# Altium PCB PenguinPi.PcbDoc
Units mm, origin at the board's own origin, x right, y up, seen from the top; angles counter-clockwise.
Board outline 65 x 78.84 mm, 2 copper layers (Top Layer, Bottom Layer); 57 components, 63 nets, 263 pads, 88 vias.
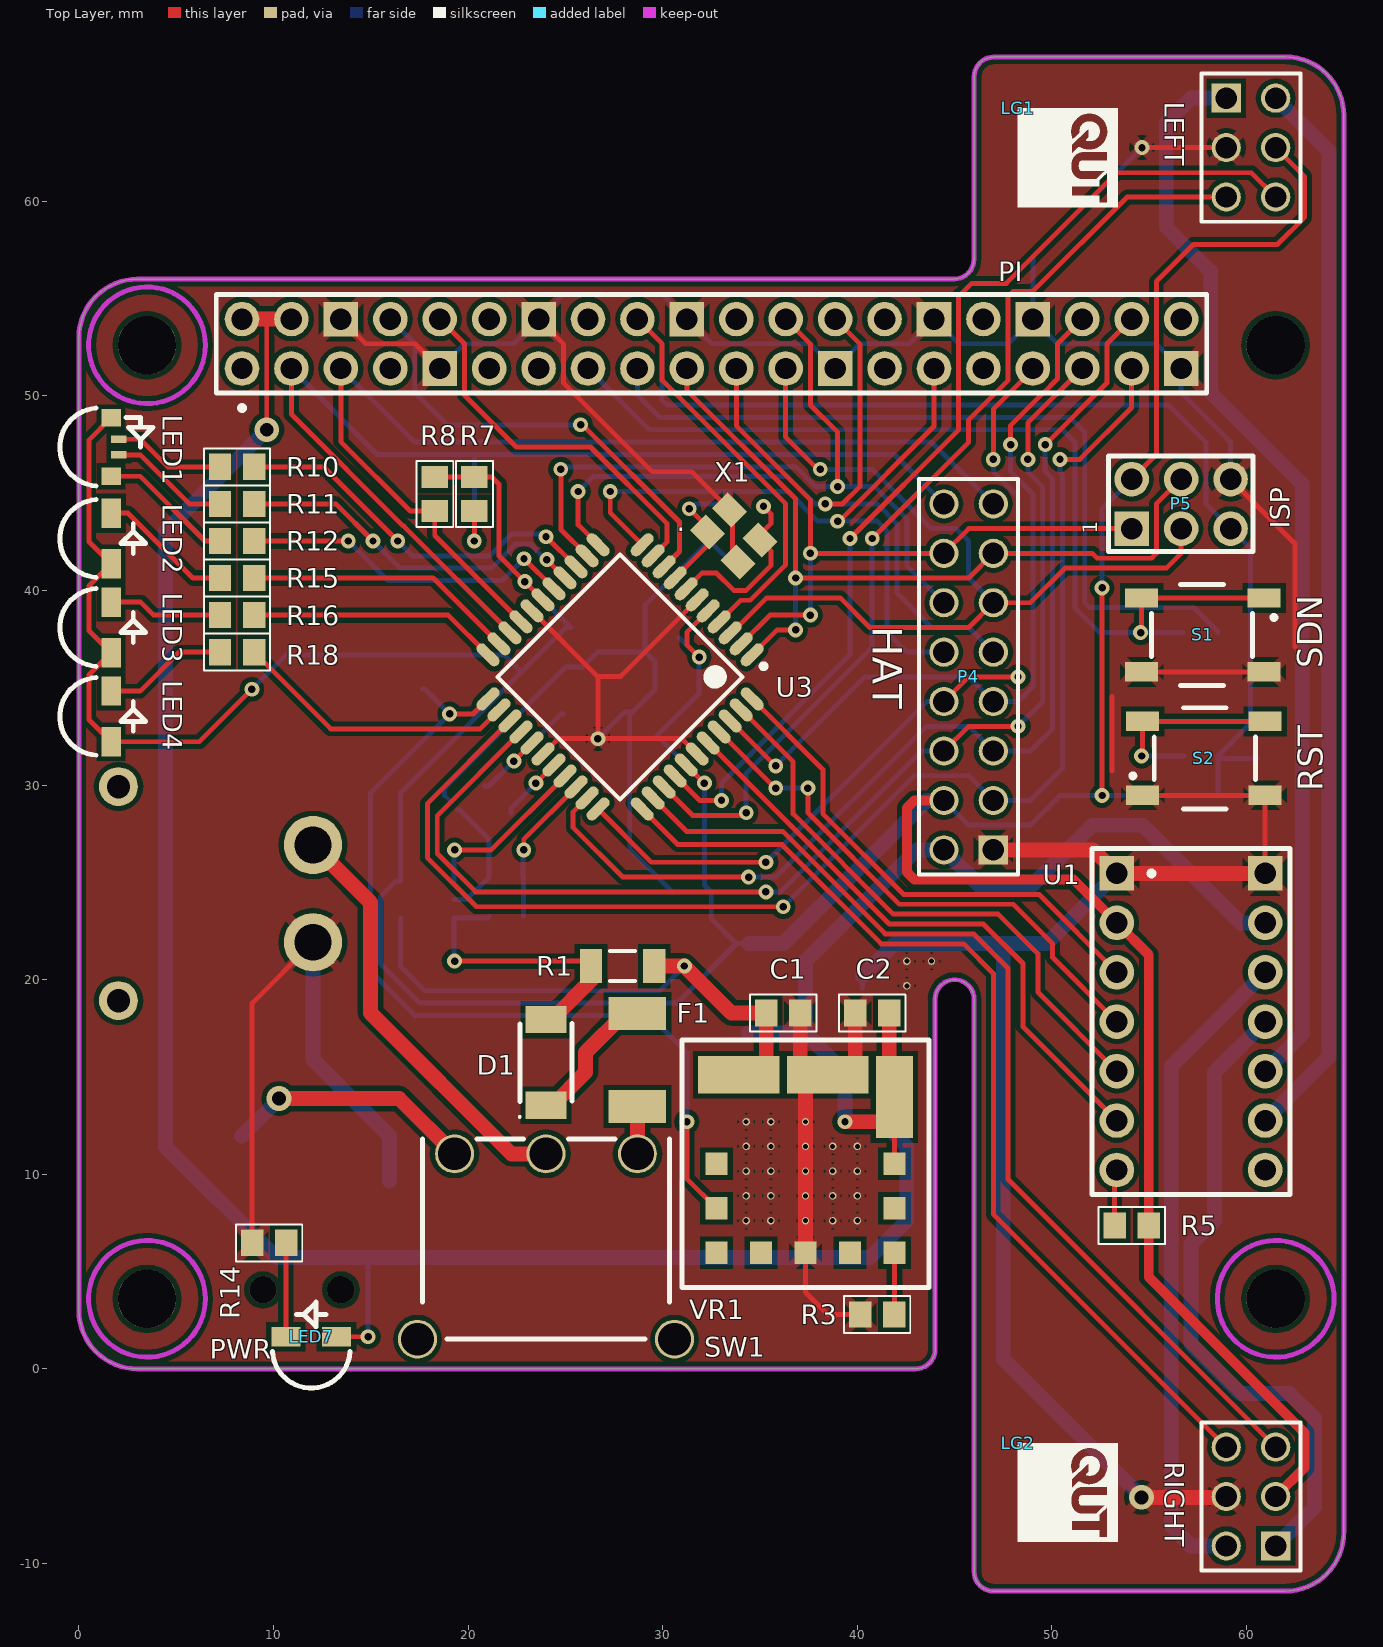
[diagram p0: Top Layer view]
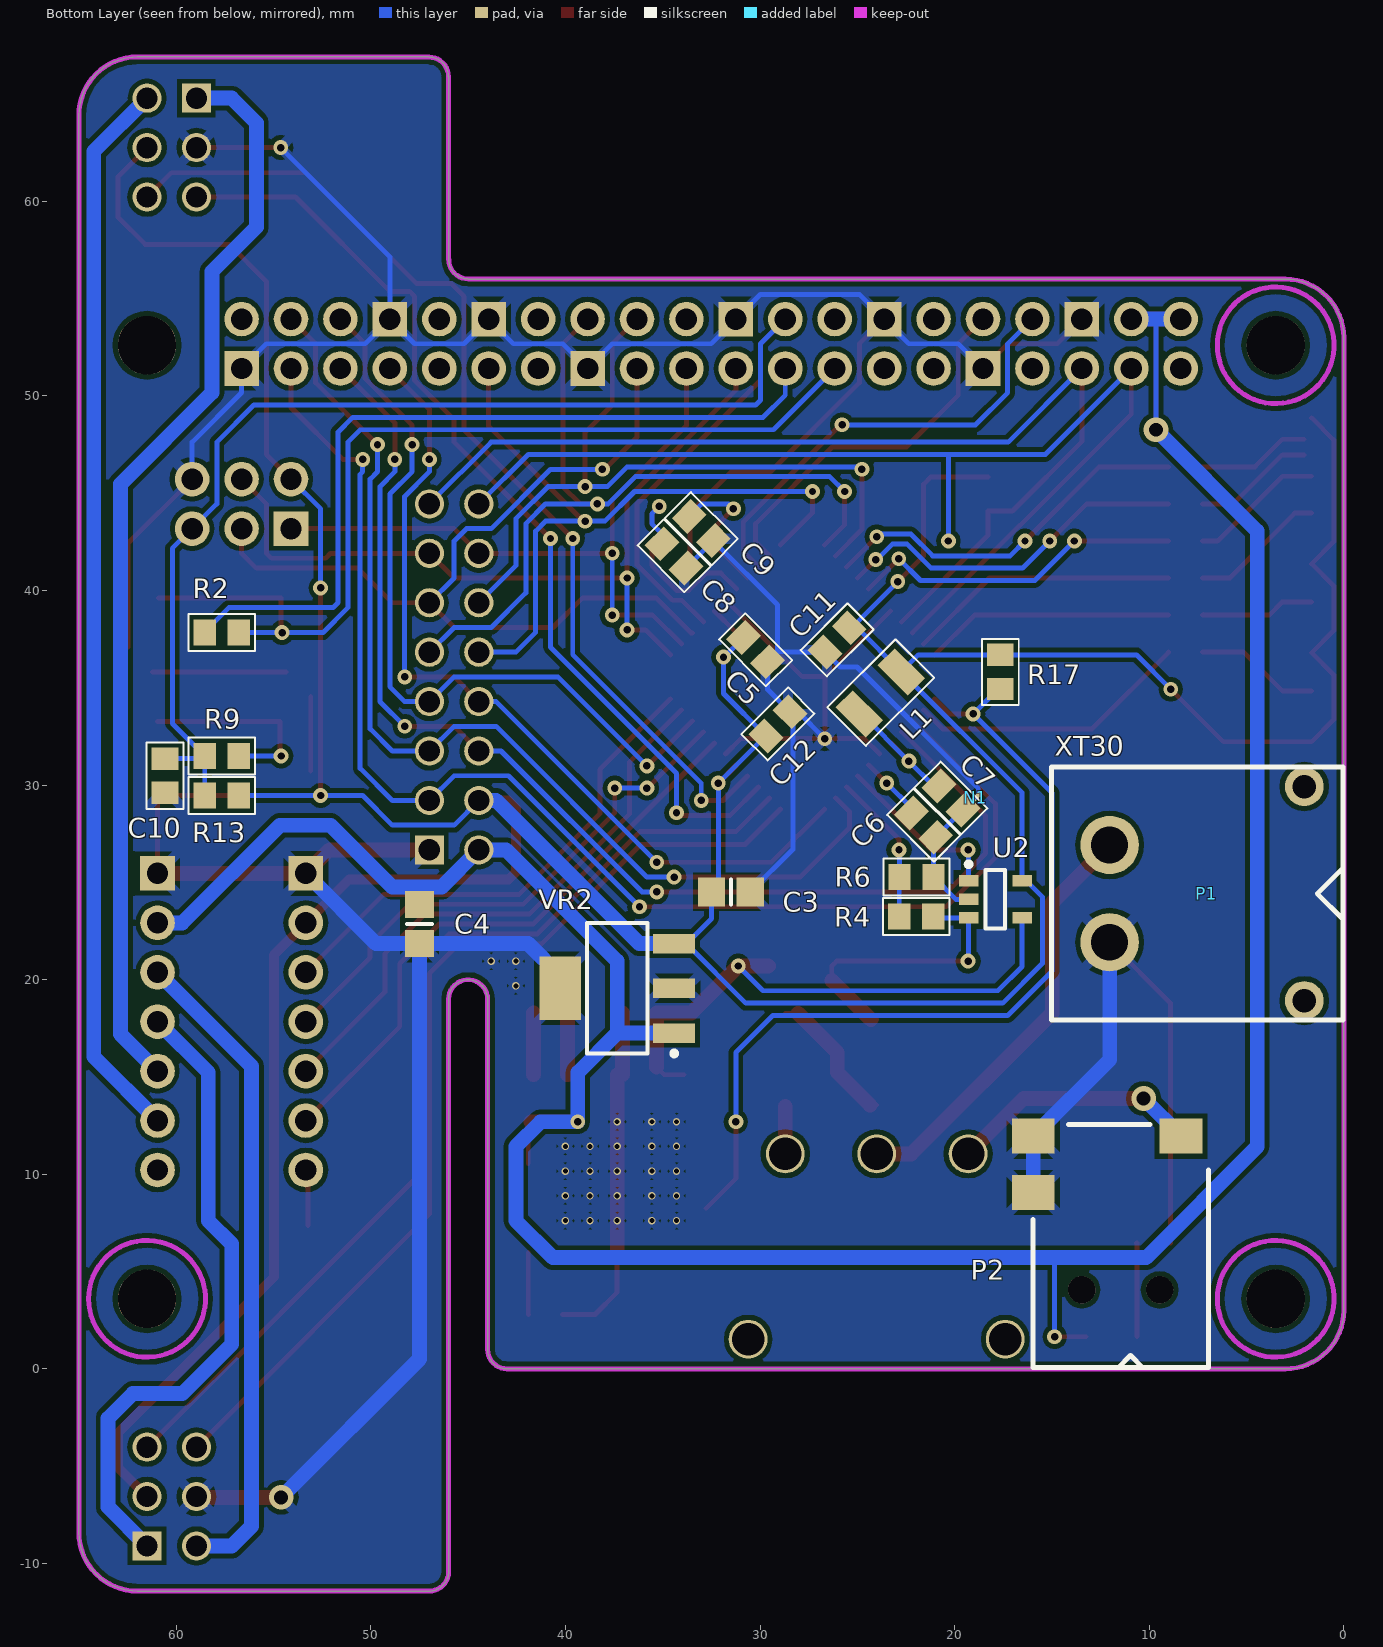
[diagram p1: Bottom Layer view, seen from below]
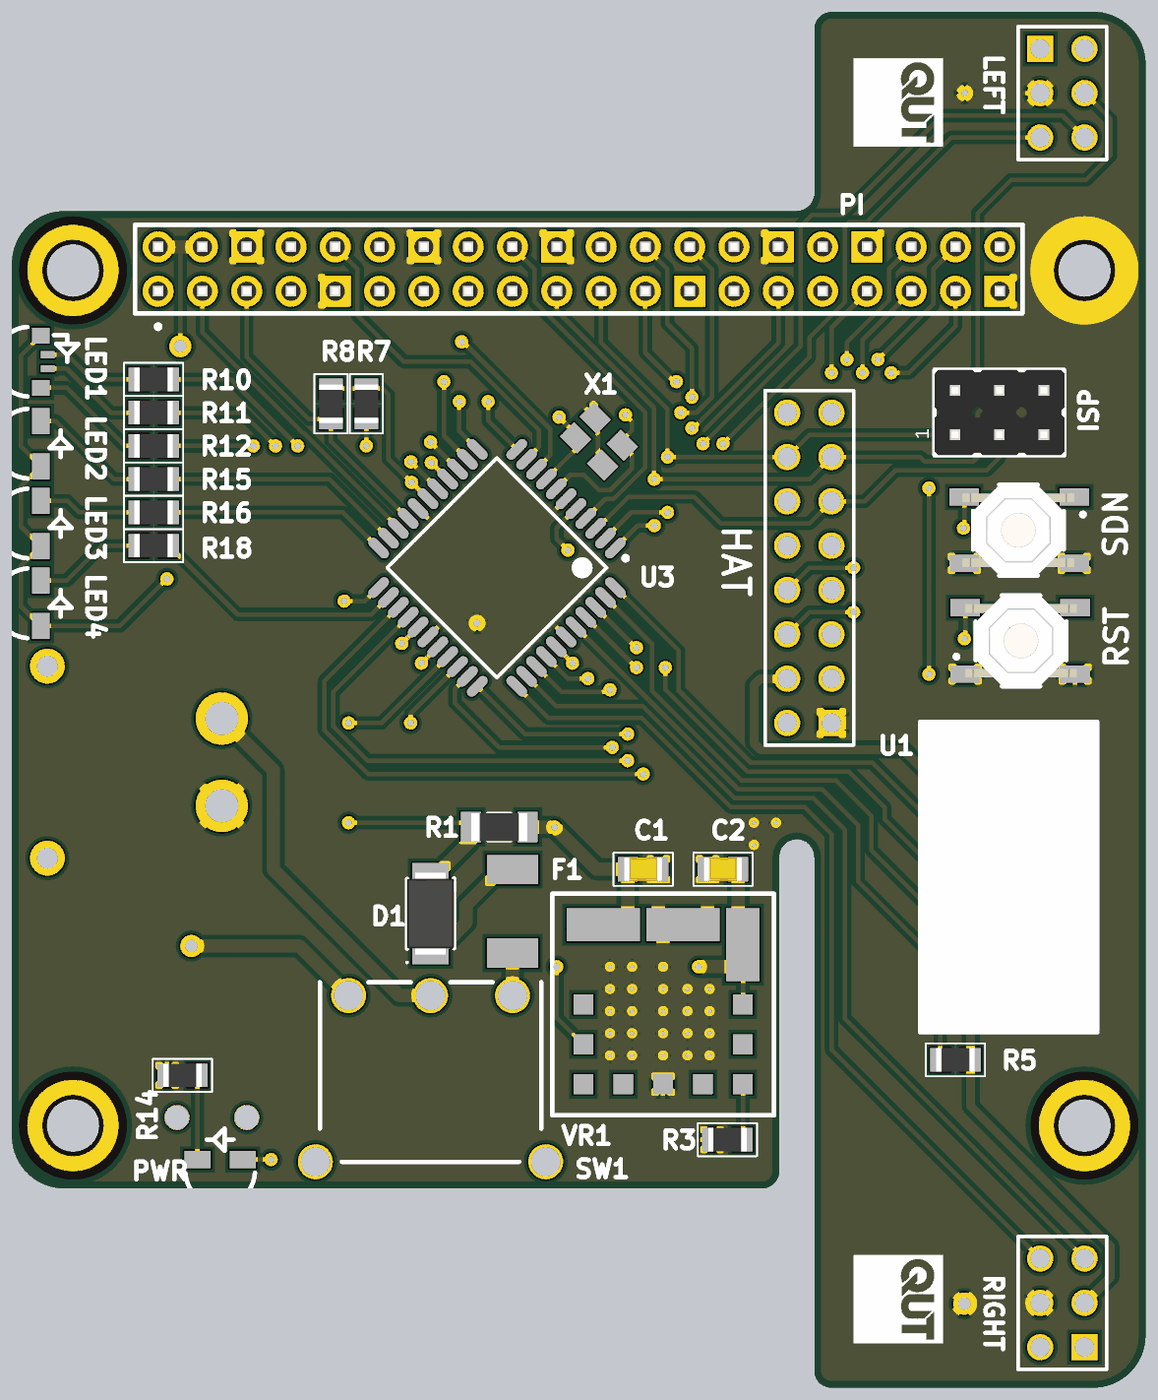
[diagram p2: 3D render of the assembled board from above, using the file's embedded part models]
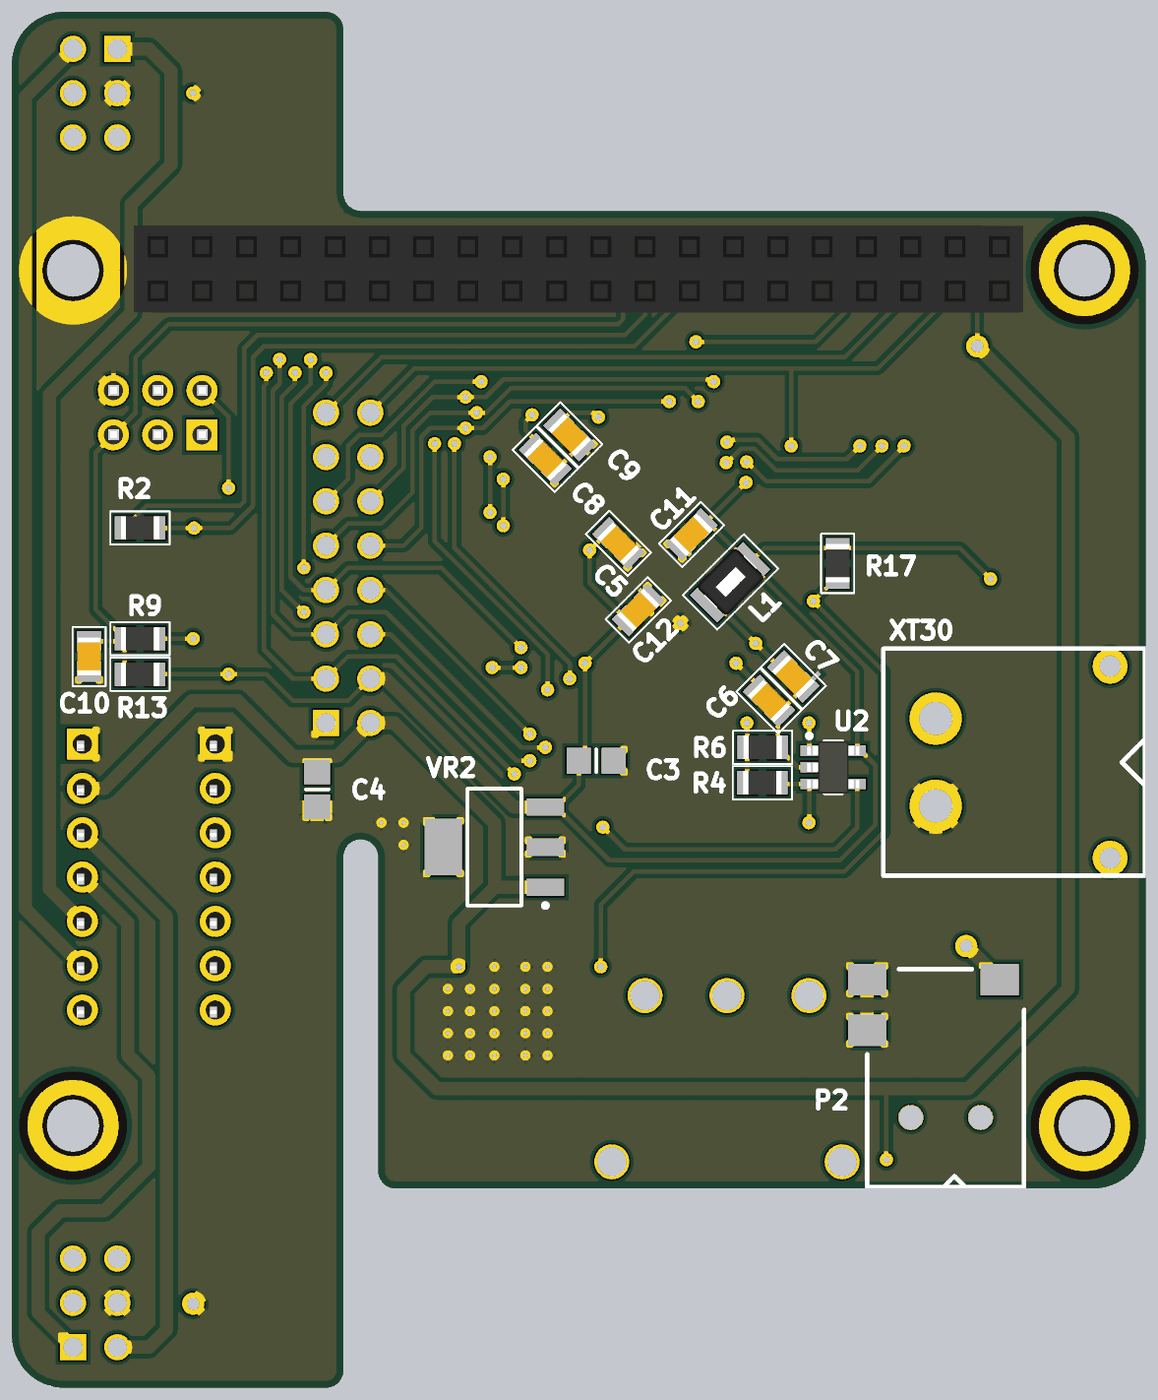
[diagram p3: 3D render of the assembled board from below, using the file's embedded part models]

## Layer stack, top to bottom
Top Solder: solder mask 0.0102, Solder Resist, Dk 3.5
Top Layer: signal copper 0.0356
Dielectric 1: dielectric 0.32, FR-4, Dk 4.8
Bottom Layer: signal copper 0.0356
Bottom Solder: solder mask 0.0102, Solder Resist, Dk 3.5

## Board outline
3,0 43,0 ccw(c43,1) 44,1 44,19 cw(c45,19) 46,19 46,-10.42 ccw(c47,-10.42) 47,-11.42 62,-11.42 ccw(c62,-8.42) 65,-8.42 65,64.42 65.001,64.42 ccw(c62.001,64.42) 62.001,67.42 47.008,67.42 47.008,67.412 ccw(c47.008,66.412) 46.008,66.412 46,66.412 46,57.008 45.992,57.008 cw(c44.992,57.008) 44.992,56.008 44.992,56 3,56 ccw(c3,53) 0,53 0,3 ccw(c3,3)

## Design rules (kind name [scope] priority, off if disabled: settings)
Clearance [All] p1: gap=0.254
PolygonConnect [All] p1: connectstyle=Relief reliefconductorwidth=0.508 reliefentries=4 polygonreliefangle="45 Angle" airgapwidth=0.254
RoutingVias [All] p1: holewidth=0.711 width=1.27 viastyle="Through Hole" minholewidth=0.711 minwidth=1.27 maxholewidth=0.711 maxwidth=1.27
SolderMaskExpansion [All] p1: expansion=0.102
Width [All] p1: maxlimit=0.762 minlimit=0.254 preferedwidth=0.254
30 further rules are at their usual default settings.

## Classes and differential pairs
net class Power: MA1 MA2 MB1 MB2 NetC1_2 NetD1_1 NetD1_2 NetF1_1

## Components (designator, comment, footprint, x,y, rotation, side; value= is the part's Value field where it differs from the comment)
C1 "CAP SMD" CAPC2012X07N 36.195,18.288 r180 top
C2 "CAP SMD" CAPC2012X07N 40.767,18.288 r0 top
C3 "Cap" 6-0805_M 31.496,24.511 r0 bottom
C4 "Cap Pol1" 6-0805_M 47.498,22.86 r270 bottom
C5 "CAP SMD" CAPC2012X07N 30.226,36.957 r45 bottom
C6 "CAP SMD" CAPC2012X07N 21.59,27.94 r45 bottom
C7 "CAP SMD" CAPC2012X07N 20.193,29.337 r45 bottom
C8 "CAP SMD" CAPC2012X07N 34.417,41.783 r45 bottom
C9 "CAP SMD" CAPC2012X07N 33.02,43.18 r45 bottom
C10 "CAP SMD" CAPC2012X07N 60.579,30.48 r90 bottom
C11 "CAP SMD" CAPC2012X07N 26.035,37.465 r135 bottom
C12 "CAP SMD" CAPC2012X07N 29.083,33.147 r315 bottom
D1 "SMD DIODE" SODFL470X110-2N 24.003,15.748 r90 top
F1 "RGEF250" MF-MSMF250/16X-2 28.702,15.875 r90 top
L1 "INDUCTOR SMD" CM322522 22.738,35.814 r315 bottom
LED1 "LED RGB RightAngle" "LED RGB RightAngle" 1.651,47.371 r270 top
LED2 "" "LED YELLOW RightAngle" 1.651,42.672 r270 top
LED3 "" "LED YELLOW RightAngle" 1.651,38.1 r270 top
LED4 "" "LED YELLOW RightAngle" 1.651,33.528 r270 top locked
LED7 "PWR" "LED YELLOW RightAngle" 11.938,1.651 r0 top
LEFT "Header 3X2" HDR2X3 58.96,65.3 r270 top locked
LG1 "QUT_Logo" QUT_Logo 48.26,64.77 r270 top
LG2 "QUT_Logo" QUT_Logo 48.26,-3.81 r270 top
N1 "NETTIE" NETTIE-SMD-5mil 18.785,29.475 r315 bottom net-tie
P1 "XT30" "XT30 - PCB mount" 12.032,24.423 r270 bottom locked
P2 "DC Jack SMD" "DC Jack SMD" 10.962,0.064 r90 bottom locked
P4 "HAT" HDR2X8 46.99,26.67 r90 top locked
P5 "ISP" "Header 3x2 nonstandard" 54.102,43.18 r90 top locked
PI "RPi Header" "RPI 2 Header" 8.382,51.408 r90 top locked
R1 "RES SMD" RESC3216X06M 27.94,20.701 r0 top
R2 "RES SMD" RESC2012X07N 57.658,37.846 r0 bottom
R3 "RES SMD" RESC2012X07N 41.021,2.794 r0 top
R4 "RES SMD" RESC2012X07N 21.971,23.241 r180 bottom
R5 "RES SMD" RESC2012X07N 54.102,7.366 r180 top
R6 "RES SMD" RESC2012X07N 21.957,25.273 r0 bottom
R7 "RES SMD" RESC2012X07N 20.32,44.958 r90 top
R8 "RES SMD" RESC2012X07N 18.288,44.958 r90 top
R9 "RES SMD" RESC2012X07N 57.658,31.496 r0 bottom
R10 "RES SMD" RESC2012X07N 8.128,46.355 r0 top
R11 "RES SMD" RESC2012X07N 8.128,44.45 r0 top
R12 "RES SMD" RESC2012X07N 8.128,42.545 r0 top
R13 "RES SMD" RESC2012X07N 57.658,29.464 r180 bottom
R14 "RES SMD" RESC2012X07N 9.779,6.477 r180 top
R15 "RES SMD" RESC2012X07N 8.128,40.64 r0 top
R16 "RES SMD" RESC2012X07N 8.128,38.735 r0 top
R17 "RES SMD" RESC2012X07N 17.653,35.814 r90 bottom
R18 "RES SMD" RESC2012X07N 8.128,36.83 r0 top
RIGHT "Header 3X2" HDR2X3 61.5,-9.1 r90 top locked
S1 "SDN" E-SWITCH-TL3342 60.91,39.614 r180 top locked
S2 "RST" E-SWITCH-TL3342 54.66,29.474 r0 top locked
SW1 "PCB Switch" "PCB Switch" 24.003,11.049 r0 top locked
U1 "DRV8835_CARRIER" DRV8835_CARRIER 53.34,25.46 r0 top locked
U2 "TSC888" SOT95P280X145-5N 17.907,24.13 r180 bottom
U3 "ATmega644PA-AU" 44A_L 27.813,35.56 r225 top locked
VR1 "Murata OKL-T/3-W12" OKL-T/3-W12 37.338,10.541 r0 top locked
VR2 "FT_SOT223" SOT233-4N 37.338,19.558 r0 bottom
X1 "20MHz" "XTAL TSX3225" 33.655,42.799 r315 top

## Footprints (in the part's own frame and the unit in brackets; to place one, negate y for a bottom-side part, rotate by r counter-clockwise, add the part's x,y. Pads: shape width x height; smd on the part's side, far side on the other; paste and mask are expansions set on the pad)
6-0805_M [mm] "Chip Resistor, Body 2.0x1.2mm, IPC Low Density"
  rect 1.4x1.5 smd: 1(-1,0) 2(1,0)
  silkscreen extent 0,-0.65 0,0.65, body extent -1.07,-0.7 1.07,0.7, height 0.7
44A_L [mm] "Thin QFP, 44-Leads, Body 10x10mm, Pitch 0.8mm, IPC High Density"
  oval 1.45x0.55 smd: 1(-5.6,4) 2(-5.6,3.2) 3(-5.6,2.4) 4(-5.6,1.6) 5(-5.6,0.8) 6(-5.6,0) 7(-5.6,-0.8) 8(-5.6,-1.6) 9(-5.6,-2.4) 10(-5.6,-3.2) 11(-5.6,-4) 23(5.6,-4) 24(5.6,-3.2) 25(5.6,-2.4) 26(5.6,-1.6) 27(5.6,-0.8) 28(5.6,0) 29(5.6,0.8) 30(5.6,1.6) 31(5.6,2.4) 32(5.6,3.2) 33(5.6,4)
  oval 0.55x1.45 smd: 12(-4,-5.6) 13(-3.2,-5.6) 14(-2.4,-5.6) 15(-1.6,-5.6) 16(-0.8,-5.6) 17(0,-5.6) 18(0.8,-5.6) 19(1.6,-5.6) 20(2.4,-5.6) 21(3.2,-5.6) 22(4,-5.6) 34(4,5.6) 35(3.2,5.6) 36(2.4,5.6) 37(1.6,5.6) 38(0.8,5.6) 39(0,5.6) 40(-0.8,5.6) 41(-1.6,5.6) 42(-2.4,5.6) 43(-3.2,5.6) 44(-4,5.6)
  silkscreen extent -5.72,-4.45 4.45,4.95, body extent -5,-5 5,5, height 1.2
CAPC2012X07N [mm] "Chip Capacitor, 2-Leads, Body 2.00x1.25mm, IPC Medium Density"
  rect 1.15x1.4 smd: 1(-0.875,0) 2(0.875,0)
  silkscreen extent -1.7,-0.95 1.7,0.95, body extent -1.1,-0.67 1.1,0.68, height 0.7
CM322522 [mm] "BOURNS SMD INDUCTOR"
  rect 1.25x2.2 smd: 1(0,0) 2(3.05,0)
  silkscreen extent -0.97,-1.4 3.98,1.4, body extent -0.15,-1.25 3.15,1.25, height 2.2
"DC Jack SMD" [mm] "Digikey CP1-021PJCT-ND"
  round 1.4 hole 1.4: 0(4,-1.5) 0(4,2.5)
  rect 1.8x2.2 smd: 1(11.9,-2.6) 2(9,5) 3(11.9,5)
  silkscreen extent 0,-4 12.5,5
DRV8835_CARRIER [mil]
  rect 70x70 hole 43.31: 1(0,0) 14(300,0)
  round 70 hole 43.31: 2(0,-100) 3(0,-200) 4(0,-300) 5(0,-400) 6(0,-500) 7(0,-600) 8(300,-600) 9(300,-500) 10(300,-400) 11(300,-300) 12(300,-200) 13(300,-100)
  silkscreen extent -50,-650 350,50, body extent -49,-651 351,49, height 417
E-SWITCH-TL3342 [mm]
  rect 1.7x1 smd: 1(0,0) 2(6.3,0) 3(0,3.8) 4(6.3,3.8)
  silkscreen extent -0.6,-0.7 5.8,4.5, body extent 0,-0.7 6.4,4.5, height 1.54
HDR2X3 [mm] "Connector; Header; 3x2 Position"
  rect 1.5x1.5 hole 1.1: 1(0,0)
  round 1.5 hole 1.1: 2(0,2.54) 3(2.54,0) 4(2.54,2.54) 5(5.08,0) 6(5.08,2.54)
  silkscreen extent -1.27,-1.27 6.35,3.81
HDR2X8 [mm] "Connector; Header; 8x2 Position"
  rect 1.5x1.5 hole 1.1: 1(0,0)
  round 1.5 hole 1.1: 2(0,2.54) 3(2.54,0) 4(2.54,2.54) 5(5.08,0) 6(5.08,2.54) 7(7.62,0) 8(7.62,2.54) 9(10.16,0) 10(10.16,2.54) 11(12.7,0) 12(12.7,2.54) 13(15.24,0) 14(15.24,2.54) 15(17.78,0) 16(17.78,2.54)
  silkscreen extent -1.27,-1.27 19.05,3.81
"Header 3x2 nonstandard" [mil] "nonstandard, staggered pins"
  rect 70x70 hole 43.31: 1(0,0)
  round 70 hole 43.31: 2(100,0) 3(0,-100) 4(100,-100) 5(0,-200) 6(100,-200)
  silkscreen extent -46,-245 147,47, body extent -46,-246 147,47, height 331
"LED RGB RightAngle" [mm]
  rect 0.9x1 smd: 1(1.5,0) 2(-1.5,0)
  rect 0.4x0.8 smd: 3(-0.4,0.4) 4(0.4,0.4)
  silkscreen extent -2,-2.63 2,2.16
"LED YELLOW RightAngle" [mm]
  rect 1.5x1 smd: 1(-1.3,0) 2(1.3,0)
  silkscreen extent -2,-2.63 2,1.78
MF-MSMF250/16X-2 [mm] "SMD Fuse"
  rect 1.68x2.95 smd: 1(-2.39,0) 2(2.39,0)
NETTIE-SMD-5mil [mil]
  rect 10x10 smd paste+0 mask+0: 1(0,0) 2(14.76,0)
  Top Layer lines w7.87: 0.98,0 13.78,0
OKL-T/3-W12 [mil] "Murata Programmable Regulator"
  rect 45x45 smd: 1(-180,0) 5(180,0) 6(180,-180) 7(0,-180) 8(-90,-180) 9(-180,-180) 10(-180,-90) 11(180,-90) 12(90,-180)
  rect 165x75 smd: 2(-135,180) 3(45,180)
  rect 75x165 smd: 4(180,135)
  silkscreen extent -250,-250 250,250
"PCB Switch" [mm] "1101M2S3ABE2"
  round 2 hole 1.68: 0(-6.604,-9.525) 0(6.604,-9.525) 1(4.699,0) 2(0,0) 3(-4.699,0)
  silkscreen extent -6.35,-9.53 6.35,0.76
QUT_Logo [mm]
  silkscreen extent 0,0.01 5.08,5.12
RESC2012X07N [mm] "Chip Resistor, 2-Leads, Body 2.00x1.25mm, IPC Medium Density"
  rect 1.15x1.35 smd: 1(-0.875,0) 2(0.875,0)
  silkscreen extent -1.7,-0.95 1.7,0.95, body extent -1.1,-0.68 1.1,0.67, height 0.7
RESC3216X06M [mm] "Chip Resistor, 2-Leads, Body 3.20x1.60mm, IPC Low Density"
  rect 1.15x1.75 smd: 1(-1.625,0) 2(1.625,0)
  silkscreen extent -0.65,-0.77 0.65,0.77, body extent -1.61,-0.81 1.61,0.81, height 0.62
"RPI 2 Header" [mil]
  round 70 hole 43.31: 1(0,0) 2(100,0) 3(0,-100) 4(100,-100) 5(0,-200) 7(0,-300) 8(100,-300) 10(100,-400) 11(0,-500) 12(100,-500) 13(0,-600) 15(0,-700) 16(100,-700) 17(0,-800) 18(100,-800) 19(0,-900) 21(0,-1000) 22(100,-1000) 23(0,-1100) 24(100,-1100) 26(100,-1200) 27(0,-1300) 28(100,-1300) 29(0,-1400) 31(0,-1500) 32(100,-1500) 33(0,-1600) 35(0,-1700) 36(100,-1700) 37(0,-1800) 38(100,-1800) 40(100,-1900)
  rect 70x70 hole 43.31: 6(100,-200) 9(0,-400) 14(100,-600) 20(100,-900) 25(0,-1200) 34(100,-1600) 39(0,-1900)
  rect 70x70 hole 43.31 mask+4: 30(100,-1400)
  silkscreen extent -85,-1952 150,52, body extent -48,-1954 149,54, height 374
SODFL470X110-2N [mm] "SODFL, 2-Leads, Body 2.50x4.70mm, IPC Medium Density"
  rect 1.4x2.1 smd: 1(-2.2,0) 2(2.2,0)
  silkscreen extent -2.85,-1.35 2.01,1.4, body extent -2.35,-1.35 2.35,1.35, height 1.1
SOT95P280X145-5N [mm] "SOT23, 5-Leads, Body 2.90x2.80mm, Pitch 0.95mm, IPC Medium Density"
  rect 1x0.6 smd: 1(-1.375,0.95) 2(-1.375,0) 3(-1.375,-0.95) 4(1.375,-0.95) 5(1.375,0.95)
  silkscreen extent -1.5,-1.5 0.5,1.92, body extent -1.5,-1.5 1.5,1.5, height 1.45
SOT233-4N [mm] "SOT223, 4-Leads, Body 6.50x7.00mm (avg), Pitch 2.30mm, IPC Medium Density"
  rect 2.15x1 smd: 1(-2.925,2.3) 2(-2.925,0) 3(-2.925,-2.3)
  rect 2.15x3.25 smd: 4(2.925,0)
  silkscreen extent -3.05,-3.35 1.55,3.47, body extent -1.85,-3.35 1.85,3.35, height 1.8
"XT30 - PCB mount" [mm] "Amass XT30PW"
  round 2 hole 1.2: 0(-5.5,10) 0(5.5,10)
  round 3 hole 1.9: 1(2.5,0) 2(-2.5,0)
  silkscreen extent -6.5,-3 6.5,12
"XTAL TSX3225" [mm] "3.2mm x 2.5mm"
  rect 1.4x1.15 smd: 1(-1.1,-0.8) 2(1.1,-0.8) 3(1.1,0.8) 4(-1.1,0.8)

## Part data
C1 C2 C5 C6 C7 C8 C9 C10 C11 C12: "Surface mount capacitor"
C3: "Capacitor"
C4: "Polarized Capacitor (Radial)"
D1: "Surface mount Diode"
F1: "PPTC Thermal Fuse"
L1: "Surface Mount Inductor - varying sizes"
LED2 LED3 LED4 LED7: library part "LED Yellow RightAngle"
LEFT RIGHT: "Header, 3-Pin, Dual row"
P4: library part "Header 8X2", "Header, 8-Pin, Dual row"
P5: library part "Header 3x2 Staggered", "3 by 2 header, staggered pin arrangement"
PI: library part "RPi 2 Header", "GPIO connector for Raspberry Pi Microcomputer"
R1 R2 R3 R4 R5 R6 R7 R8 R9 R10 R11 R12 R13 R14 R15 R16 R17 R18: "0805 surface mount resistor"
S1 S2: library part E-SWITCH-PUSHBUTTON, "TL 3342 surface mount pushbutton"
U1: "DRV8835 Motor Controller"
U2: "Curent Sense Amplifier"
U3: library part CMP-0095-00289-2, "8-bit AVR Microcontroller, 64KB Flash, 2KB EEPROM, 4KB SRAM, 44-pin TQFP, Industrial Grade (-40°C to 85°C)"
X1: library part "XTAL ABM3B"

## Free pads (board coordinates)
  round 3 hole 3 unplated mask+1.6: 0(3.5,3.6) 1(61.5,3.6) 2(61.5,52.6) 3(3.5,52.6)

## Via types
v1: diameter 0.762, hole 0.381, Top Layer to Bottom Layer, 59 vias
v2: diameter 0.381, hole 0.254, Top Layer to Bottom Layer, 26 vias
v3: diameter 1.27, hole 0.711, Top Layer to Bottom Layer, 3 vias

## Nets (pads, with @x,y where several pads share a name; then routed paths per layer and width w, separated by ;. In a path a pad name is that pad's centre, name@x,y a point inside that pad or via, vN(x,y) a via of type N, cw(c..) or ccw(c..) an arc to the next point about the centre after c; other vN are vias at no path point)
3V3: C3.2 C5.2 C11.2 C12.2 L1.1 LED1.2 LED2.2 LED3.2 LED4.2 LEFT.4 P4.4 P5.2 R5.1 R7.2 R8.2 R13.2 R17.2 RIGHT.3 U1.2 U2.5 U3.5 U3.17 U3.38 VR2.3 | length 241
  Top Layer w0.254: LED1.2 0.508,47.728 0.508,42.515 LED2.2 0.508,40.229 0.508,37.943 LED3.2 0.508,35.657 0.508,33.371 LED4.2 6.193,32.228 v1(8.89,34.925) ; R8.2 R7.2 21.223,45.833 21.59,45.466 21.59,41.783 v1(22.918,40.455) U3.17 ; U3.38 v1(32.143,30.099) ; v1(31.877,36.576) 31.242,37.211 31.242,37.846 32.338,38.942 U3.5 ; v1(52.578,29.464) v1(52.578,40.132) ; P5.2 55.372,46.99 55.372,55.88 57.277,57.785 61.595,57.785 62.992,59.182 62.992,61.268 LEFT.4
  Top Layer w0.508: P4.4 42.926,29.21 42.545,28.829 42.545,25.527 42.926,25.146 51.114,25.146 U1.2 54.977,21.283 R5.1 54.977,4.713 62.992,-3.302 62.992,-5.068 RIGHT.3
  Bottom Layer w0.254: v1(8.89,34.925) 10.654,36.689 R17.2 21.863,36.689 L1.1 ; v1(22.918,40.455) 25.289,38.084 25.007,38.084 L1.1 ; C5.2 31.877,36.543 31.877,34.704 C12.2 29.713,32.528 v1(32.143,30.099) 32.143,24.864 C3.2 32.496,23.13 33.768,21.858 VR2.3@33.796,21.858 ; VR2.3 VR2.3@33.796,21.858 ; P4.4 45.72,27.94 48.895,27.94 50.419,29.464 v1(52.578,29.464) R13.2 ; v1(52.578,40.132) 52.578,44.196 P5.2 ; L1.1 16.532,29.608 U2.5 16.317,25.08 15.494,24.257 15.494,20.83 17.528,18.796 30.734,18.796 VR2.3@33.796,21.858
  Bottom Layer w0.762: VR2.3 36.209,21.858 43.561,29.21 P4.4
CSENSE: U2.1 U3.30 | length 8.8
  Top Layer w0.254: v1(19.304,26.67) 21.186,26.67 U3.30
  Bottom Layer w0.254: U2.1 v1@19.282,26.648
ENCA1: LEFT.6 U3.37 | length 53.3
  Top Layer w0.254: U3.37 31.9,29.21 v1(33.02,29.21) ; v1(39.624,42.672) 45.212,48.26 45.212,55.118 45.881,55.787 47.659,55.787 53.34,61.468 60.252,61.468 LEFT.6
  Bottom Layer w0.254: v1(33.02,29.21) 33.02,30.099 39.624,36.703 v1(39.624,42.672)
ENCA2: LEFT.5 U3.36 | length 50.3
  Top Layer w0.254: U3.36 31.531,28.448 34.163,28.448 v1(34.29,28.575) ; v1(40.767,42.672) 45.72,47.625 45.72,48.768 47.752,50.8 47.752,55.118 48.006,55.372 49.022,55.372 53.87,60.22 LEFT.5
  Bottom Layer w0.254: v1(34.29,28.575) 34.29,30.607 40.767,37.084 v1(40.767,42.672)
ENCB1: RIGHT.5 U3.35 | length 52.2
  Top Layer w0.254: U3.35 31.223,27.624 36.162,27.624 41.434,22.352 45.974,22.352 47.752,20.574 47.752,9.728 RIGHT.5
ENCB2: RIGHT.6 U3.34 | length 50.8
  Top Layer w0.254: U3.34 30.77,26.946 36.122,26.946 41.224,21.844 45.466,21.844 46.99,20.32 46.99,7.95 RIGHT.6
GND: C1.1 C2.1 C3.1 C4.2 C5.1 C8.1 C9.1 C10.1 C11.1 C12.1 LEFT.3 N1.1 P1.1 P2.2 P2.3 P4.1 P5.6 PI.6 PI.9 PI.14 PI.20 PI.25 PI.30 PI.34 PI.39 R3.1 R14.2 RIGHT.4 S1.3 S1.4 S2.1 S2.2 U1.1 U1.14 U3.6 U3.18 U3.28 U3.39 VR1.3 VR1.7 VR2.2 VR2.4 X1.2 X1.4 | length 302.6
  Top Layer w0.254: R14.2 8.904,18.795 P1.1 ; PI.6 14.732,52.678 17.272,52.678 PI.9 ; U3.18 26.67,35.572 ; PI.14 24.892,52.678 24.892,50.673 29.464,46.101 31.484,46.101 X1.4 33.594,43.991 33.594,41.729 X1.2 ; U3.28 24.638,32.385 v1(26.67,32.385) ; U3.39 30.988,32.385 v1(26.67,32.385) ; U3.6 27.825,35.572 26.67,35.572 ; VR1.7 37.338,3.937 38.481,2.794 R3.1 ; 53.086,30.734 53.086,34.544 ; S2.1@54.346,29.474 S2.1 S2.2 U1.14 ; S1.4@54.356,35.814 S1.4 S1.3 S1.3@61.214,35.814 ; v1(54.632,62.76) LEFT.3 ; RIGHT.4@58.916,-6.604 RIGHT.4 ; P5.6 62.484,42.418 62.484,37.084 ; v1(26.67,32.385) 26.67,35.572
  Top Layer w0.762: VR1.3@37.07,15.113 C1.1 ; VR1.7 v2(37.338,7.62) v2(37.338,8.89) v2(37.338,10.16) v2(37.338,11.43) v2(37.338,12.7) VR1.3@37.338,15.113 ; VR1.3@39.892,15.113 C2.1 ; P4.1 52.13,26.67 U1.1 U1.14 ; v3(54.61,-6.604) RIGHT.4@58.916,-6.604
  Bottom Layer w0.254: P2.2@15.835,9.525 P2.2@15.962,9.652 ; PI.9 19.812,52.678 22.352,52.678 PI.14 24.892,55.218 29.972,55.218 PI.20 32.512,52.678 37.592,52.678 PI.25 40.132,52.678 42.672,52.678 PI.30 45.212,52.678 47.752,52.678 PI.34 ; N1.1 18.785,29.834 25.019,36.068 25.875,36.068 C11.1 29.099,36.846 ; v1(26.67,32.385) 28.051,33.766 C12.1 ; C3.1 28.307,26.7 28.307,33.608 C12.1 ; C8.1 C9.1 29.099,39.259 29.099,36.846 ; VR2.4 VR2.4@40.263,20.197 ; v1(54.632,62.76) 49.022,57.15 PI.34 ; P5.6 59.182,47.625 56.642,50.165 PI.39 55.372,52.678 50.292,52.678 PI.34 ; C10.1 C10.1@60.96,29.224 ; C12.1 29.607,34.909 C5.1 29.099,36.846
  Bottom Layer w0.762: P1.1 12.032,15.894 P2.3 P2.2@15.962,9.652 ; VR2.4@40.263,20.197 41.926,21.86 C4.2 ; U1.1 49.74,21.86 C4.2 ; v3(54.61,-6.604) 47.498,0.508 C4.2
  other v2: 34.29,7.62 35.56,7.62 38.735,7.62 40.005,7.62 34.29,8.89 35.56,8.89 38.735,8.89 40.005,8.89 34.29,10.16 35.56,10.16 38.735,10.16 40.005,10.16 34.29,11.43 35.56,11.43 38.735,11.43 40.005,11.43 34.29,12.7 35.56,12.7 42.545,19.685 42.545,20.955 43.815,20.955
HAT_00: P4.3 PI.37 U3.25 | length 69.2
  Top Layer w0.254: U3.25 17.907,29.048 17.907,26.271 20.429,23.749 v1(36.195,23.749) ; v1(50.419,46.736) 51.435,46.736 54.102,49.403 PI.37
  Bottom Layer w0.254: v1(36.195,23.749) 42.926,30.48 45.72,30.48 P4.3 48.895,29.21 50.546,30.861 50.546,45.974 50.419,46.101 v1(50.419,46.736)
HAT_01: P4.5 PI.38 U3.32 | length 54.9
  Top Layer w0.254: U3.32 25.4,28.622 25.4,27.813 27.94,25.273 v1(34.417,25.273) ; P4.5 P4.5@47.073,31.75 ; v1(49.657,47.498) 52.832,50.673 52.832,52.678 PI.38
  Bottom Layer w0.254: v1(34.417,25.273) 35.814,25.273 43.561,33.02 45.72,33.02 P4.5 48.895,31.75 50.038,32.893 50.038,45.72 49.657,46.101 v1(49.657,47.498)
HAT_02: P4.7 PI.36 U3.42 | length 40.1
  Top Layer w0.254: U3.42 35.779,30.988 v1(35.814,30.988) ; v1(47.879,47.498) 47.879,48.487 49.53,50.138 49.548,50.138 50.292,50.882 50.292,52.678 PI.36
  Bottom Layer w0.254: v1(35.814,30.988) 40.386,35.56 45.72,35.56 P4.7 48.26,34.29 49.022,35.052 49.022,44.958 47.879,46.101 v1(47.879,47.498)
HAT_03: P4.9 PI.26 U3.12 | length 41.9
  Top Layer w0.254: v1(25.654,45.085) 25.654,43.376 U3.12 ; v1(38.354,44.45) 39.243,44.45 40.132,45.339 40.132,52.678 PI.26
  Bottom Layer w0.254: v1(25.654,45.085) 26.416,45.847 36.405,45.847 37.802,44.45 v1(38.354,44.45) 41.021,44.45 42.037,43.434 42.037,39.878 43.815,38.1 45.72,38.1 P4.9
HAT_04: P4.12 PI.24 U3.13 | length 38.8
  Top Layer w0.254: v1(24.765,46.228) 24.765,43.133 U3.13 ; PI.24 37.592,52.678 37.592,49.53 38.989,48.133 v1(38.989,45.339)
  Bottom Layer w0.254: v1(24.765,46.228) 24.892,46.355 36.83,46.355 37.846,45.339 v1(38.989,45.339) 40.894,45.339 42.545,43.688 42.545,41.275 P4.12
HAT_05: P4.10 PI.29 U3.11 | length 37
  Top Layer w0.254: v1(27.305,45.085) 27.305,43.988 U3.11 ; v1(38.989,43.561) 39.072,43.561 43.942,48.431 PI.29
  Bottom Layer w0.254: v1(27.305,45.085) 36.449,45.085 37.973,43.561 v1(38.989,43.561) 41.021,43.561 41.529,43.053 41.529,37.846 42.545,36.83 P4.10
HAT_06: P4.8 PI.33 U3.33 | length 43.9
  Top Layer w0.254: U3.33 29.418,26.035 v1(35.306,26.035) ; P4.8 45.72,35.56 v1(48.26,35.56) ; v1(46.99,46.736) 46.99,49.32 49.022,51.352 PI.33
  Bottom Layer w0.254: v1(35.306,26.035) 43.561,34.29 P4.8 ; v1(46.99,46.736) 46.99,46.101 48.26,44.831 v1(48.26,35.56)
HAT_07: P4.6 PI.35 U3.26 | length 62.6
  Top Layer w0.254: U3.26 18.415,28.425 18.415,26.481 20.385,24.511 v1(35.306,24.511) ; P4.6 45.72,33.02 v1(48.26,33.02) ; v1(48.768,46.736) 48.768,48.614 PI.35
  Bottom Layer w0.254: v1(35.306,24.511) 36.068,24.511 43.307,31.75 P4.6 ; v1(48.26,33.02) 49.53,34.29 49.53,45.339 48.768,46.101 v1(48.768,46.736)
LED-B: R11.2 U3.15 | length 18.6
  Top Layer w0.254: R11.2 13.208,44.45 v1(15.113,42.545) ; v1(24.049,41.587) U3.15
  Bottom Layer w0.254: v1(15.113,42.545) 16.51,41.148 21.209,41.148 22.456,42.395 23.187,42.395 23.995,41.587 v1(24.049,41.587)
LED-G: R10.2 U3.14 | length 19.8
  Top Layer w0.254: R10.2 12.573,46.355 v1(16.383,42.545) ; v1@23.876,42.891 v1(24.003,42.764) U3.14
  Bottom Layer w0.254: v1(16.383,42.545) 17.145,41.783 21.126,41.783 22.245,42.903 23.864,42.903 v1(24.003,42.764)
LED-R: R12.2 U3.16 | length 17.4
  Top Layer w0.254: R12.2 v1(13.843,42.545) ; v1(22.872,41.633) U3.16
  Bottom Layer w0.254: v1(13.843,42.545) 15.875,40.513 21.752,40.513 v1(22.872,41.633)
LED-Y0: R15.2 U3.21 | length 14
  Top Layer w0.254: R15.2 18.208,40.64 U3.21
LED-Y1: R16.2 U3.22 | length 12.9
  Top Layer w0.254: R16.2 18.981,38.735 U3.22
LED-Y2: R18.2 U3.24 | length 14.6
  Top Layer w0.254: R18.2 12.94,32.893 20.621,32.893 U3.24
MA1: LEFT.2 U1.9 | length 55
  Bottom Layer w0.762: U1.9 64.238,16.038 64.238,62.562 LEFT.2
MA2: LEFT.1 U1.10 | length 56
  Bottom Layer w0.762: LEFT.1 57.15,65.3 55.88,64.03 55.88,58.674 58.166,56.388 58.166,50.165 62.865,45.466 62.865,17.205 U1.10
MAPH: U1.6 U3.40 | length 30.9
  Top Layer w0.254: U3.40 41.644,22.86 46.482,22.86 48.514,20.828 48.514,17.586 U1.6
MAPWM: U1.5 U3.43 | length 29.7
  Top Layer w0.254: U3.43 36.703,31.195 36.703,28.52 41.855,23.368 47.244,23.368 49.276,21.336 49.276,19.364 U1.5
MB1: RIGHT.1 U1.11 | length 33.5
  Bottom Layer w0.762: U1.11 58.354,15.234 58.354,7.62 57.15,6.416 57.15,1.27 59.69,-1.27 62.23,-1.27 63.5,-2.54 63.5,-7.1 RIGHT.1
MB2: RIGHT.2 U1.12 | length 33.7
  Bottom Layer w0.762: RIGHT.2 57.15,-9.1 56.134,-8.084 56.134,15.554 U1.12
MBPH: U1.4 U3.41 | length 28.2
  Top Layer w0.254: U3.41 35.791,29.845 v1(35.814,29.845) ; v1(37.465,29.845) 37.465,28.575 42.164,23.876 48.006,23.876 50.038,21.844 50.038,21.142 U1.4
  Bottom Layer w0.254: v1(35.814,29.845) v1(37.465,29.845) ; U1.4@53.026,17.526 U1.4
MBPWM: U1.3 U3.44 | length 26.3
  Top Layer w0.254: U3.44 38.227,30.803 38.227,28.531 42.374,24.384 49.336,24.384 U1.3
  Bottom Layer w0.254: U1.3@53.026,20.066 U1.3
MISO: P4.14 P5.1 PI.21 U3.2 | length 35.5
  Top Layer w0.254: PI.21 33.782,48.47 37.592,44.66 v1(37.592,41.91) P4.14 45.72,43.18 P5.1 ; U3.2 35.513,38.735 v1(37.592,38.735)
  Bottom Layer w0.254: v1(37.592,38.735) v1(37.592,41.91)
MOSI: P4.13 P5.4 PI.19 U3.1 | length 42.1
  Top Layer w0.254: PI.19 31.242,50.292 36.83,44.704 v1(36.83,40.64) 45.72,40.64 P4.13 52.07,41.91 52.324,41.656 55.118,41.656 55.372,41.91 55.372,44.45 P5.4 ; U3.1 35.883,37.973 v1(36.83,37.973)
  Bottom Layer w0.254: v1(36.83,37.973) v1(36.83,40.64)
NetC1_2: C1.2 R1.2 U2.4 VR1.2 | length 29.2
  Top Layer w0.254: VR1.2 34.925,15.113 VR1.2@35.32,15.508
  Top Layer w0.762: R1.2 v1(31.115,20.701) 33.528,18.288 C1.2 VR1.2@35.32,15.508
  Bottom Layer w0.254: U2.4 16.532,20.679 17.78,19.431 29.845,19.431 v1(31.115,20.701)
NetC6_2: C6.2 U3.29 | length 3.4
  Top Layer w0.254: v1(23.483,30.099) U3.29
  Bottom Layer w0.254: C6.2 22.209,28.824 v1(23.483,30.099)
NetC7_2: C7.2 L1.2 U3.27 | length 6.9
  Top Layer w0.254: v1(22.352,31.23) U3.27
  Bottom Layer w0.254: C7.2 21.077,29.956 v1(22.352,31.23) 24.779,33.657 L1.2
NetC8_2: C8.2 U3.7 X1.3 | length 11.5
  Top Layer w0.254: U3.7 32.016,40.894 32.766,40.894 33.655,40.005 34.29,40.005 35.56,41.275 35.56,42.025 X1.3 34.999,42.873 35.56,43.434 35.56,43.942 v1(35.179,44.323)
  Bottom Layer w0.254: C8.2 35.036,42.91 35.56,43.434 35.56,43.942 v1(35.179,44.323)
NetC9_2: C9.2 U3.8 X1.1 | length 7.3
  Top Layer w0.254: U3.8 32.311,42.321 X1.1 32.311,43.254 v1(31.369,44.196)
  Bottom Layer w0.254: v1(31.369,44.196) 31.623,44.45 32.987,44.45 C9.2
NetD1_1: D1.1 F1.2 | length 7.3
  Top Layer w0.254: D1.1@24.003,13.566 D1.1 D1.1@24.343,13.548 ; F1.2@28.044,18.265 F1.2
  Top Layer w0.762: D1.1@24.343,13.548 26.035,15.24 26.035,16.256 F1.2@28.044,18.265
NetD1_2: D1.2 R1.1 R4.2 U2.3 | length 15.1
  Top Layer w0.254: v1(19.304,20.955) 26.061,20.955 R1.1 R1.1@26.315,19.965 ; D1.2 D1.2@24.298,17.948
  Top Layer w0.762: D1.2@24.298,17.948 R1.1@26.315,19.965
  Bottom Layer w0.254: v1@19.282,20.955 U2.3 21.035,23.18 R4.2
NetF1_1: F1.1 SW1.1 | length 2.4
  Top Layer w0.762: SW1.1 F1.1
NetLED1_1: LED1.1 R12.1 | length 7
  Top Layer w0.254: LED1.1 3.151,45.871 6.477,42.545 R12.1
NetLED1_3: LED1.3 R10.1 | length 5.8
  Top Layer w0.254: LED1.3 3.156,47.771 4.572,46.355 R10.1
NetLED1_4: LED1.4 R11.1 | length 6.2
  Top Layer w0.254: LED1.4 3.156,46.971 5.677,44.45 R11.1
NetLED2_1: LED2.1 R15.1 | length 7
  Top Layer w0.254: LED2.1 2.524,43.972 5.856,40.64 R15.1
NetLED3_1: LED3.1 R16.1 | length 5.9
  Top Layer w0.254: LED3.1 3.175,39.4 3.84,38.735 R16.1 R16.1@7.223,38.765
NetLED4_1: LED4.1 R18.1 | length 6.4
  Top Layer w0.254: LED4.1 3.145,34.828 5.147,36.83 R18.1
NetLED7_1: LED7.1 R14.1 | length 4.8
  Top Layer w0.254: LED7.1 10.638,6.461 R14.1
NetPI_15: PI.15 R2.1 S1.1 S1.2 | length 49.2
  Top Layer w0.254: v1@54.61,37.886 S1.2 S1.1
  Bottom Layer w0.254: PI.15 29.31,48.26 50.546,48.26 51.181,47.625 51.181,39.116 52.461,37.836 v1(54.56,37.836) R2.1@56.733,37.836
NetPI_17: PI.17 R2.2 | length 41.4
  Bottom Layer w0.254: PI.17 28.702,50.038 29.845,48.895 50.927,48.895 51.689,48.133 51.689,39.37 51.943,39.116 57.302,39.116 58.533,37.885 R2.2
NetR3_2: R3.2 VR1.6 | length 3.2
  Top Layer w0.254: R3.2 41.91,2.808 VR1.6
NetR5_2: R5.2 U1.7 | length 2.9
  Top Layer w0.254: R5.2 53.227,10.107 U1.7
NetR9_1: R9.1 S2.3 S2.4 | length 10.3
  Top Layer w0.254: v1(54.61,31.496) 54.66,31.546 S2.3 S2.4
  Bottom Layer w0.254: v1(54.61,31.496) R9.1
PWRG: R17.1 U3.23 VR1.10 | length 45.7
  Top Layer w0.254: v1(19.05,33.655) 20.251,33.655 U3.23 ; v1(31.242,12.7) 31.242,9.779 VR1.10
  Bottom Layer w0.254: R17.1 17.766,34.939 v1(19.05,33.655) 14.986,29.591 14.986,20.447 17.272,18.161 29.337,18.161 31.242,16.256 v1(31.242,12.7)
RST: C10.2 P5.5 PI.18 R9.2 R13.1 U3.4 | length 75.8
  Top Layer w0.254: PI.18 29.972,52.678 29.972,50.8 36.322,44.45 36.322,41.319 34.5,39.497 34.013,39.497 U3.4
  Bottom Layer w0.254: PI.18 29.972,52.678 29.972,49.784 30.226,49.53 56.007,49.53 57.912,47.625 57.912,44.45 P5.5 60.198,42.164 60.198,33.161 R9.2 ; R13.1 R9.2 ; C10.2 58.674,31.355 R9.2
RX: PI.8 U3.9 | length 22.8
  Top Layer w0.254: v1@25.886,48.492 30.861,43.517 30.861,42.002 U3.9
  Bottom Layer w0.254: PI.8 17.272,52.678 17.272,50.165 18.923,48.514 v1@25.4,48.514
  other v1: 25.781,48.514
SCL: P4.15 PI.5 R8.1 U3.19 | length 54
  Top Layer w0.254: PI.5 13.462,47.648 17.027,44.083 R8.1 18.288,42.822 U3.19
  Bottom Layer w0.254: PI.5 17.245,47.625 43.815,47.625 P4.15
SCLK: P4.11 P5.3 PI.23 U3.3 | length 46.2
  Top Layer w0.254: U3.3 33.545,37.823 35.346,39.624 39.116,39.624 40.64,38.1 45.72,38.1 P4.11 48.895,39.37 50.673,41.148 55.88,41.148 56.642,41.91 P5.3 ; PI.23 36.322,47.879 37.973,46.228 v1(38.1,46.228)
  Bottom Layer w0.254: v1(38.1,46.228) 40.767,46.228 43.815,43.18 45.085,43.18 45.72,42.545 45.72,40.64 P4.11
SDA: P4.16 PI.3 R7.1 U3.20 | length 60.6
  Top Layer w0.254: PI.3 10.922,49.057 16.672,43.307 16.699,43.307 22.156,37.849 U3.20 ; v1(20.32,42.545) R7.1
  Bottom Layer w0.254: PI.3 15.34,46.99 20.32,46.99 ; v1(20.32,42.545) 20.32,46.99 ; P4.16 41.91,46.99 20.32,46.99
SGND: C6.1 C7.1 N1.2 R6.1 U2.2 | length 6.5
  Bottom Layer w0.254: U2.2 19.939,24.13 R6.1 21.082,27.211 C6.1 C7.1 C7.1@19.447,28.718
TX: PI.10 U3.10 | length 19.5
  Top Layer w0.254: PI.10 19.812,52.678 19.812,50.038 22.479,47.371 26.289,47.371 30.226,43.434 30.226,42.498 U3.10
V_DIV: R4.1 R6.2 U3.31 | length 7.8
  Top Layer w0.254: v1(22.86,26.67) 22.86,27.213 U3.31
  Bottom Layer w0.254: v1@22.832,26.642 R6.2 22.846,25.259 R4.1
VBAT: P1.2 SW1.2 | length 21.9
  Top Layer w0.762: P1.2 14.986,23.969 14.986,18.288 22.225,11.049 SW1.2
VCC: C2.2 C4.1 LED7.2 P4.2 PI.2 PI.4 U1.13 VR1.4 VR1.5 VR2.1 | length 160.1
  Top Layer w0.254: v3(9.652,48.26) 9.652,53.948 ; LED7.2 v1(14.859,1.651) ; VR1.4@41.783,12.7 41.91,12.827 VR1.5
  Top Layer w0.762: PI.2 9.652,53.948 PI.4 ; v1(39.37,12.7) VR1.4@41.783,12.7 ; VR1.4@41.642,15.113 C2.2
  Bottom Layer w0.254: v3(9.652,48.26) 9.652,53.948 ; v1(14.859,1.651) 14.859,5.715
  Bottom Layer w0.762: PI.2 PI.4 ; v3(9.652,48.26) 4.445,43.053 4.445,11.43 10.16,5.715 14.859,5.715 40.64,5.715 42.545,7.62 42.545,11.43 41.275,12.7 v1(39.37,12.7) 39.37,15.226 37.338,17.258 ; VR2.1 37.338,17.258 ; U1.13 59.69,22.92 54.67,27.94 52.07,27.94 48.895,24.765 46.355,24.765 P4.2 43.053,26.67 37.338,20.955 37.338,17.258
VDC: P2.1 SW1.3 | length 12.9
  Top Layer w0.762: v3(10.287,13.889) 16.464,13.889 SW1.3
  Bottom Layer w0.762: P2.1 v3(10.287,13.889)
pads on no net: P1.0 P2.0 PI.1 PI.7 PI.11 PI.12 PI.13 PI.16 PI.22 PI.27 PI.28 PI.31 PI.32 PI.40 SW1.0 U1.8 VR1.1 VR1.8 VR1.9 VR1.11 VR1.12

## Polygon pours and split planes (outlines as drawn)
GND on Bottom Layer "Bottom Layer-GND" (solid, pour order 8): 3.81,0 0,0 0,3.81 0,52.578 0,55.88 1.651,55.88 2.667,55.88 3.556,55.88 45.974,55.88 45.974,67.31 65.024,67.31 65.024,-11.43 45.974,-11.43 46,-11.404 46,19.1 44,19.1 43.942,19.042 43.942,0
GND on Top Layer "Top Layer-GND" (solid, pour order 12): 3.81,0 0,0 0,3.81 0,52.578 0,55.88 1.651,55.88 2.667,55.88 3.556,55.88 45.974,55.88 45.974,67.31 65.024,67.31 65.024,-11.43 45.974,-11.43 46,-11.404 46,19.1 44,19.1 43.942,19.042 43.942,0

## Keep-outs
Keep-Out Layer:
  circle w0.254: c3.5,3.6 r3.002
  circle w0.254: c61.5,3.6 r3.002
  circle w0.254: c3.5,52.6 r3
  lines w0.254: 44.992,56 3,56 ccw(c3,53) 0,53 0,37.5 0,3 ccw(c3,3) 3,0 43,0 ccw(c43,1) 44,1 44,19 cw(c45,19) 46,19 46,-10.42 ccw(c47,-10.42) 47,-11.42 62,-11.42 ccw(c62,-8.42) 65,-8.42 65,64.42 ; 44.992,56.008 ccw(c44.992,57.008) 45.992,57.008 ; 46,57.008 46,66.412 ; 46.008,66.412 cw(c47.008,66.412) 47.008,67.412 ; 47.008,67.42 62.001,67.42 cw(c62.001,64.42) 65.001,64.42

## Silkscreen, mask and mechanical layers (free items; w line width, h text height)
Top Overlay:
  text "." at 30.734,43.053 h1.02
Mechanical 1:
  lines w0.254: 44.992,56 3,56 ccw(c3,53) 0,53 0,37.5 0,3 ccw(c3,3) 3,0 43,0 ccw(c43,1) 44,1 44,19 cw(c45,19) 46,19 46,-10.42 ccw(c47,-10.42) 47,-11.42 62,-11.42 ccw(c62,-8.42) 65,-8.42 65,64.42 ; 44.992,56.008 ccw(c44.992,57.008) 45.992,57.008 ; 46,57.008 46,66.412 ; 46.008,66.412 cw(c47.008,66.412) 47.008,67.412 ; 47.008,67.42 62.001,67.42 cw(c62.001,64.42) 65.001,64.42

## Text inside footprints (layer, text, board x,y; h text height)
P5: Top Overlay "1" at 52.578,42.926 h1.27 r90